# EAGLE board MainBoard (EAGLE 9.0.1), part 1 of 2
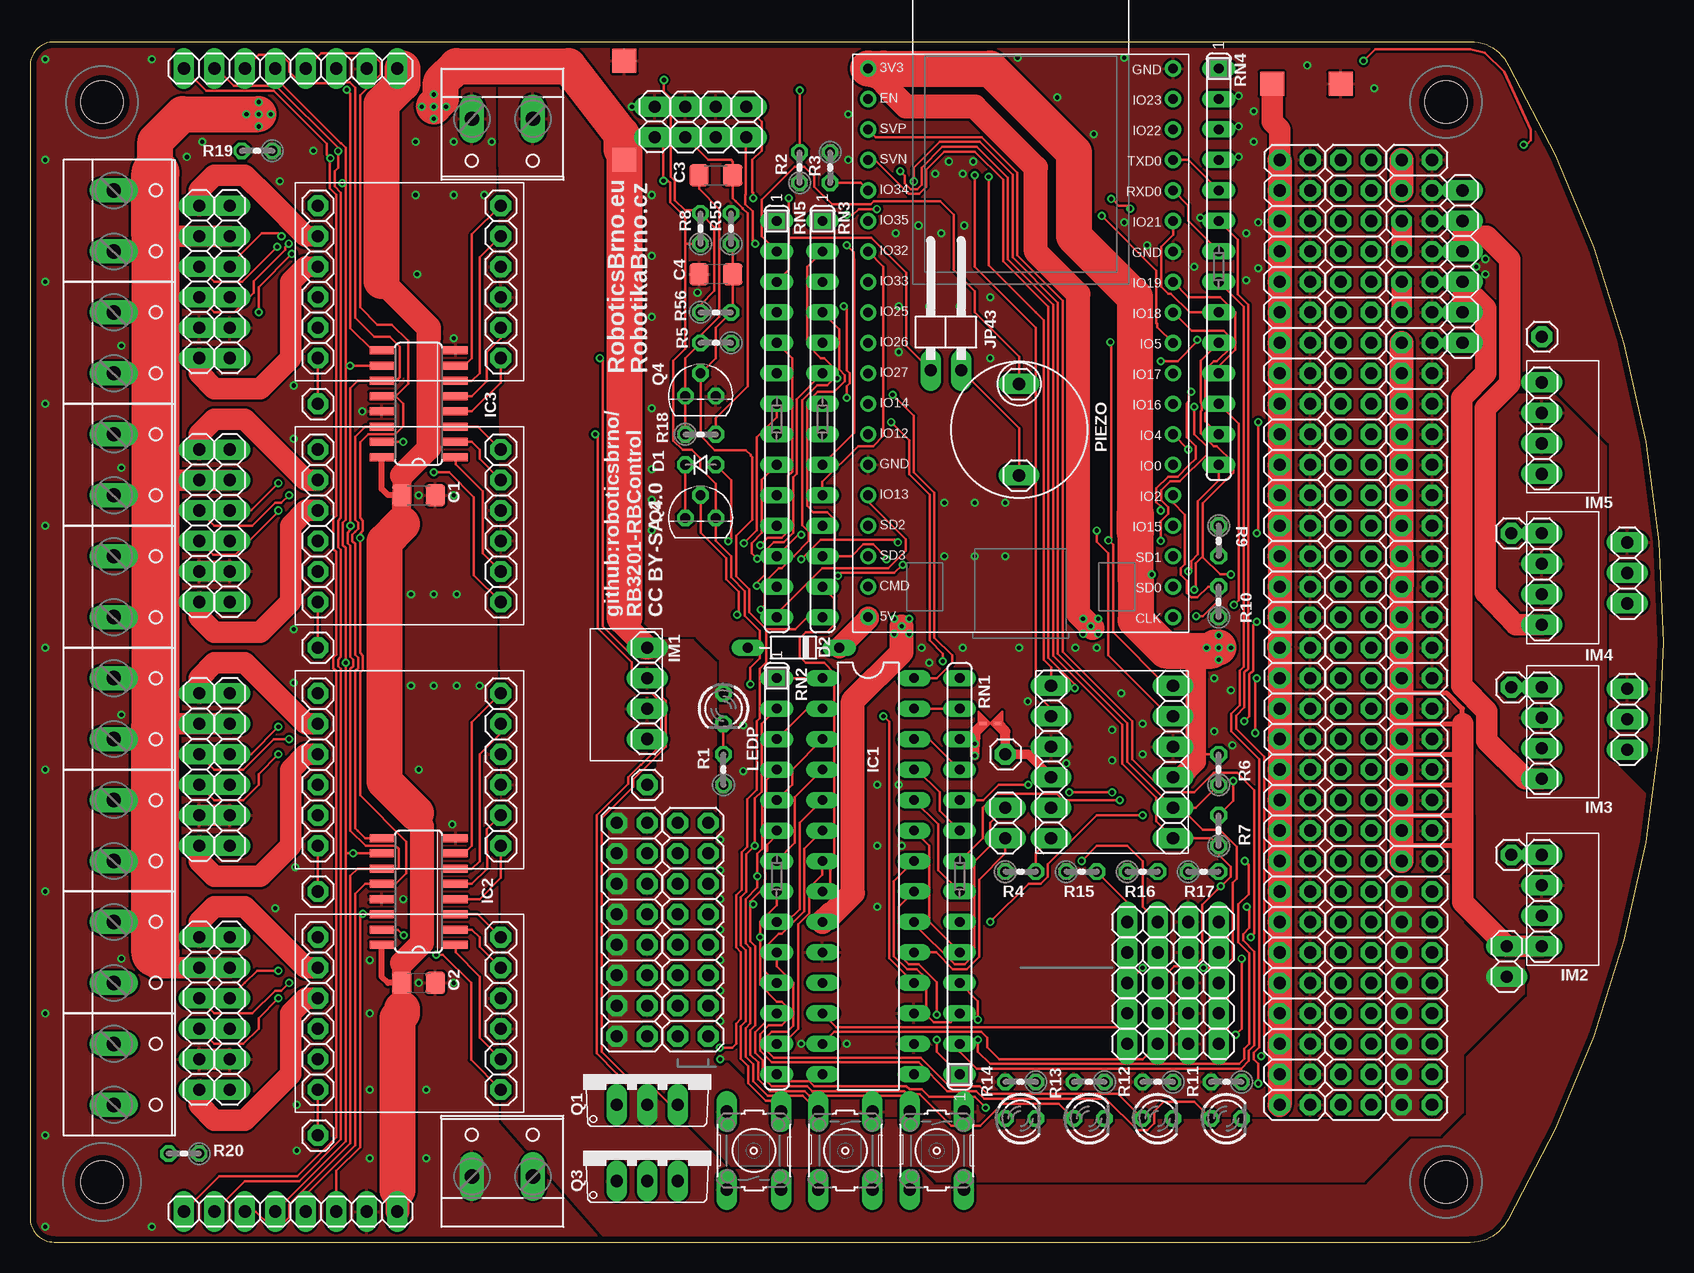
[diagram p0: board, top side]
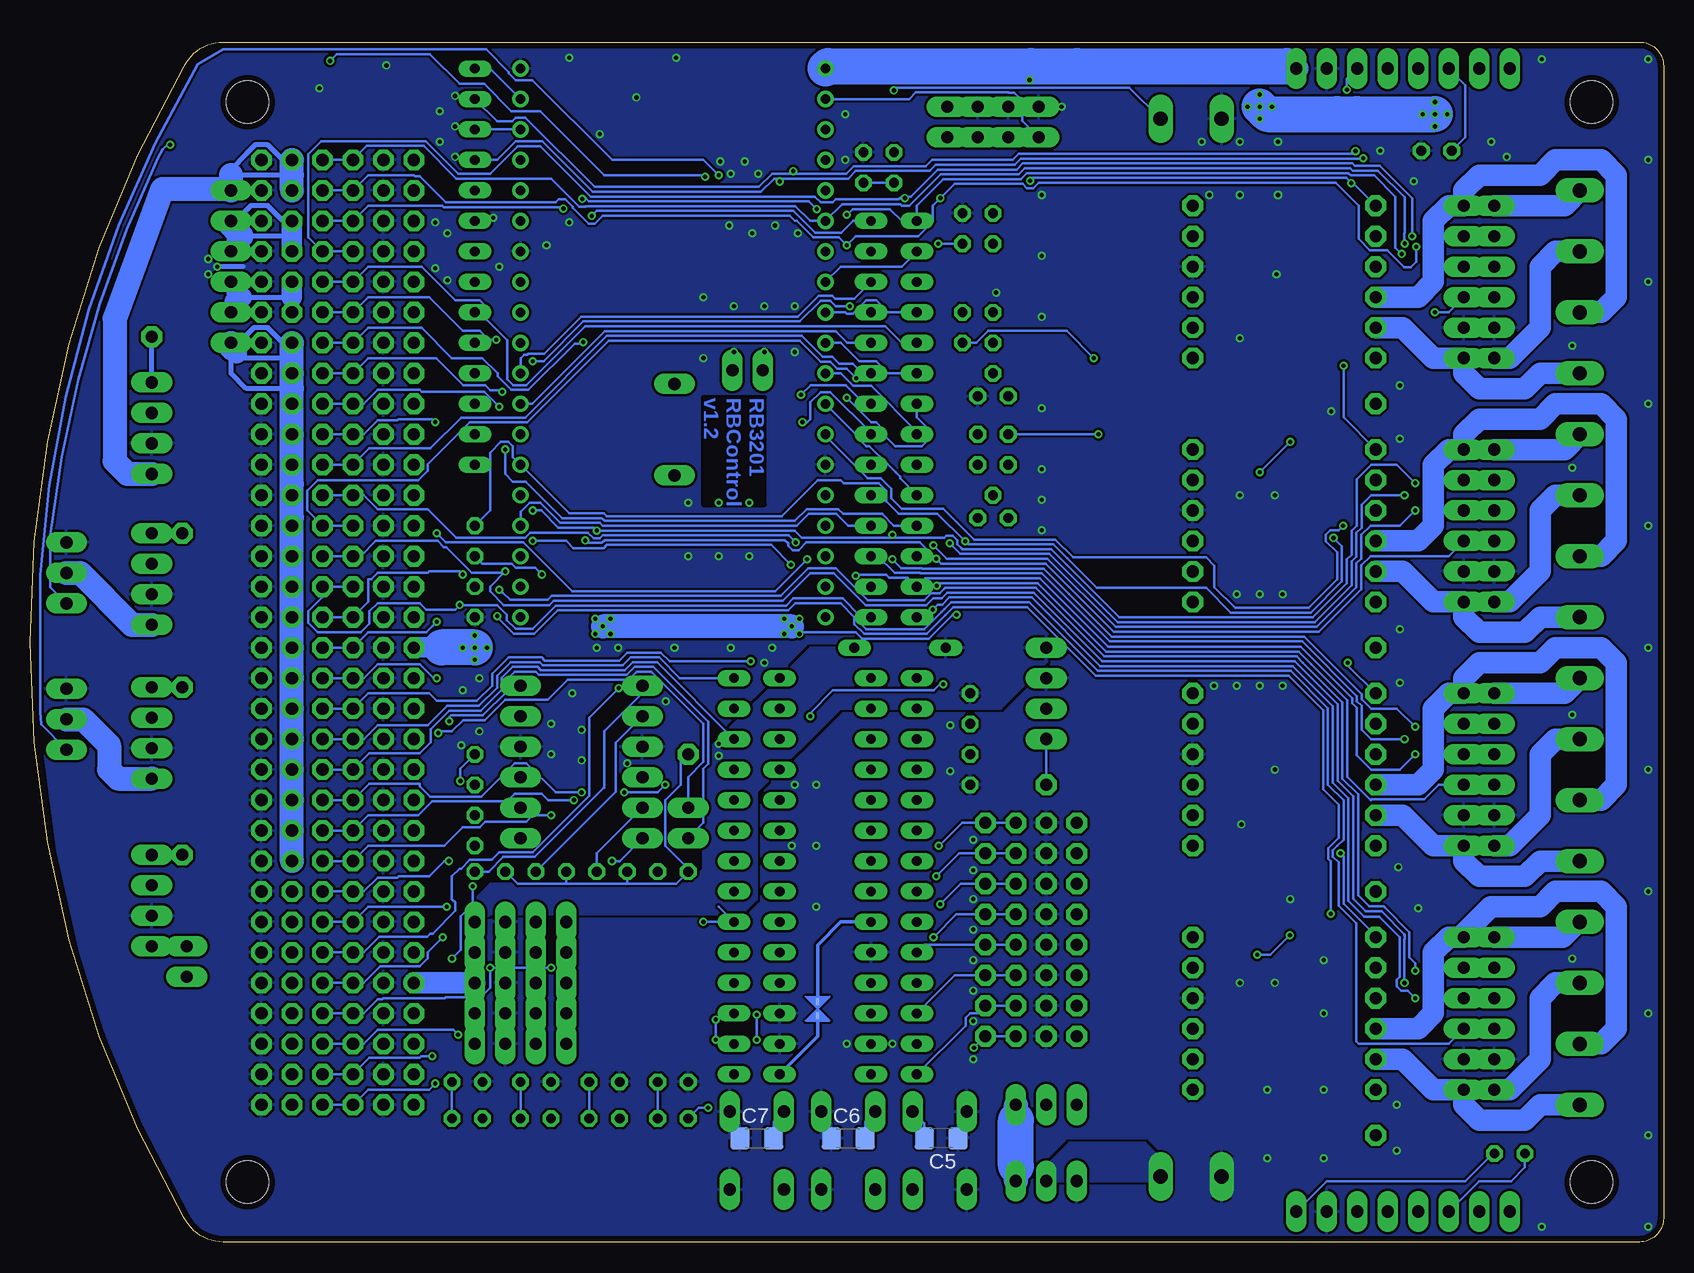
[diagram p1: board, bottom side, seen from below]

Size 136.13 x 100 mm. Coordinates in mm from the lower left corner, seen from the top.
Outline: 123.27,2 arc60 123.27,98 arc63 120.03,100 2,100 arc90 0,98 0,2 arc90 2,0 120.03,0 arc63 123.27,2
Copper layers (1*16): Top 0.035mm / dielectric 1.5mm / Bottom 0.035mm
Design rules "robotikabrno *": minimum track width 0.2mm, minimum drill 0.35mm, track to track 0.2mm, track to pad 0.2mm, pad to pad 0.2mm, via to via 0.2mm, smd to smd 0.2mm, copper to edge 0.5mm, drill to drill 0.5mm, minimum pad ring 0.16mm, minimum via ring 0.16mm, stop-mask expansion 0.1mm, vias tented up to drill 0.4mm, thermal gap 0.2mm
Net classes: 0 default: width 0.2 mm, drill 0.35 mm, clearance 0.2 mm
Holes 3.5 mm at 6,5 6,95 118,95 118,5

## Footprints (pad centres in the part's own frame; a part is rotated, then mirrored left to right if it is on the bottom)
C1206 = smd 1.6 x 1.8: 1 -1.4,0; 2 1.4,0
D-2.5 = drill 0.813 octagon: A 1.27,0; C -1.27,0
D-7.5 = drill 0.813 long: A 3.81,0; C -3.81,0
DIL28-3 = drill 0.813 long: 1 -16.51,-3.81; 2 -13.97,-3.81; 3 -11.43,-3.81; 4 -8.89,-3.81; 5 -6.35,-3.81; 6 -3.81,-3.81; 7 -1.27,-3.81; 8 1.27,-3.81; 9 3.81,-3.81; 10 6.35,-3.81; 11 8.89,-3.81; 12 11.43,-3.81; 13 13.97,-3.81; 14 16.51,-3.81; 15 16.51,3.81; 16 13.97,3.81; 17 11.43,3.81; 18 8.89,3.81; 19 6.35,3.81; 20 3.81,3.81; 21 1.27,3.81; 22 -1.27,3.81; 23 -3.81,3.81; 24 -6.35,3.81; 25 -8.89,3.81; 26 -11.43,3.81; 27 -13.97,3.81; 28 -16.51,3.81
SO16 = smd 0.66 x 2.032: 1 -4.445,-3.073; 2 -3.175,-3.073; 3 -1.905,-3.073; 4 -0.635,-3.073; 5 0.635,-3.073; 6 1.905,-3.073; 7 3.175,-3.073; 8 4.445,-3.073; 9 4.445,3.073; 10 3.175,3.073; 11 1.905,3.073; 12 0.635,3.073; 13 -0.635,3.073; 14 -1.905,3.073; 15 -3.175,3.073; 16 -4.445,3.073
STEPDOWN = drill 1.016 long: EN 1.27,8.89; GND 1.27,3.81; IN 1.27,6.35; OUT 1.27,1.27
DEVKITC = drill 0.8: 1 -12.7,46.99; 2 -12.7,44.45; 3 -12.7,41.91; 4 -12.7,39.37; 5 -12.7,36.83; 6 -12.7,34.29; 7 -12.7,31.75; 8 -12.7,29.21; 9 -12.7,26.67; 10 -12.7,24.13; 11 -12.7,21.59; 12 -12.7,19.05; 13 -12.7,16.51; 14 -12.7,13.97; 15 -12.7,11.43; 16 -12.7,8.89; 17 -12.7,6.35; 18 -12.7,3.81; 19 -12.7,1.27; 20 12.7,1.27; 21 12.7,3.81; 22 12.7,6.35; 23 12.7,8.89; 24 12.7,11.43; 25 12.7,13.97; 26 12.7,16.51; 27 12.7,19.05; 28 12.7,21.59; 29 12.7,24.13; 30 12.7,26.67; 31 12.7,29.21; 32 12.7,31.75; 33 12.7,34.29; 34 12.7,36.83; 35 12.7,39.37; 36 12.7,41.91; 37 12.7,44.45; 38 12.7,46.99
PINHEAD = drill 1.016 octagon: !SLEEP 1.27,13.97; GND 16.51,8.89; IN1 16.51,1.27; IN2 16.51,3.81; IN3 16.51,11.43; IN4 16.51,13.97; OUT1 1.27,11.43; OUT2 1.27,8.89; OUT3 1.27,6.35; OUT4 1.27,3.81; ULT 1.27,1.27; VCC 16.51,6.35
LEVEL_SHIFTER = drill 1.016 long: 1 1.27,1.27; 2 3.81,1.27; 3 6.35,1.27; 4 8.89,1.27; 5 11.43,1.27; 6 13.97,1.27; 7 13.97,11.43; 8 11.43,11.43; 9 8.89,11.43; 10 6.35,11.43; 11 3.81,11.43; 12 1.27,11.43
1X01 = drill 1.016 octagon: 1 0,0
1X02 = drill 1.016 long: 1 -1.27,0; 2 1.27,0
2X16 = drill 1.016 octagon: 1 -19.05,-1.27; 2 -19.05,1.27; 3 -16.51,-1.27; 4 -16.51,1.27; 5 -13.97,-1.27; 6 -13.97,1.27; 7 -11.43,-1.27; 8 -11.43,1.27; 9 -8.89,-1.27; 10 -8.89,1.27; 11 -6.35,-1.27; 12 -6.35,1.27; 13 -3.81,-1.27; 14 -3.81,1.27; 15 -1.27,-1.27; 16 -1.27,1.27; 17 1.27,-1.27; 18 1.27,1.27; 19 3.81,-1.27; 20 3.81,1.27; 21 6.35,-1.27; 22 6.35,1.27; 23 8.89,-1.27; 24 8.89,1.27; 25 11.43,-1.27; 26 11.43,1.27; 27 13.97,-1.27; 28 13.97,1.27; 29 16.51,-1.27; 30 16.51,1.27; 31 19.05,-1.27; 32 19.05,1.27
2X08 = drill 1.016 octagon: 1 -8.89,-1.27; 2 -8.89,1.27; 3 -6.35,-1.27; 4 -6.35,1.27; 5 -3.81,-1.27; 6 -3.81,1.27; 7 -1.27,-1.27; 8 -1.27,1.27; 9 1.27,-1.27; 10 1.27,1.27; 11 3.81,-1.27; 12 3.81,1.27; 13 6.35,-1.27; 14 6.35,1.27; 15 8.89,-1.27; 16 8.89,1.27
1X03 = drill 1.016 long: 1 -2.54,0; 2 0,0; 3 2.54,0
1X08 = drill 1.016 long: 1 -8.89,0; 2 -6.35,0; 3 -3.81,0; 4 -1.27,0; 5 1.27,0; 6 3.81,0; 7 6.35,0; 8 8.89,0
1X06 = drill 1.016 long: 1 -6.35,0; 2 -3.81,0; 3 -1.27,0; 4 1.27,0; 5 3.81,0; 6 6.35,0
1X04 = drill 1.016 long: 1 -3.81,0; 2 -1.27,0; 3 1.27,0; 4 3.81,0
1X02/90 = drill 1.016 long: 1 -1.27,-3.81; 2 1.27,-3.81
LED3MM = drill 0.813 octagon: A -1.27,0; K 1.27,0
PIEZO = drill 1.016 long: + 1.27,8.89; - 1.27,1.27
TO220V = drill 1.016 long: 1 -2.54,-2.54; 2 0,-2.54; 3 2.54,-2.54
TO92 = drill 0.813 octagon: 1 -1.27,0; 2 0,1.905; 3 1.27,0
0204V = drill 0.813 octagon: 1 -1.27,0; 2 1.27,0
SIL14 = drill 0.813 long: 1 -16.51,0; 2 -13.97,0; 3 -11.43,0; 4 -8.89,0; 5 -6.35,0; 6 -3.81,0; 7 -1.27,0; 8 1.27,0; 9 3.81,0; 10 6.35,0; 11 8.89,0; 12 11.43,0; 13 13.97,0; 14 16.51,0
B3F-10XX = drill 1.016 long: 1 -3.251,2.261; 2 3.251,2.261; 3 -3.251,-2.261; 4 3.251,-2.261
TP20SQ = smd 2 x 2: TP 0,0
SJ_NC = smd 0.61 x 0.305: P$1 0.4,1; P$2 1.6,1
W237-132 = drill 1.194 long: 1 -2.54,-0.635; 2 2.54,-0.635

## Placement (x,y rotation side)
C1  100n  [C1206]  32.38,62.23 0 top
C2  100n  [C1206]  32.38,21.59 0 top
C3  10u  [C1206]  57.15,88.9 0 top
C4  10u  [C1206]  57.15,80.64 180 top
C5  100n  [C1206]  60.2,8.64 180 bottom
C6  100n  [C1206]  67.94,8.64 0 bottom
C7  100n  [C1206]  75.56,8.64 0 bottom
D1  [D-2.5]  55.88,64.77 0 top
D2  [D-7.5]  63.63,49.53 180 top
IC1  MCP23017SP  [DIL28-3]  69.85,30.48 270 top
IC2  74HC595D  [SO16]  32.38,29.21 90 top
IC3  74HC595D  [SO16]  32.38,69.85 90 top
IM1  STEPDOWN  [STEPDOWN]  52.7,50.8 180 top
IM2  STEPDOWN  [STEPDOWN]  124.71,23.37 0 top
IM3  STEPDOWN  [STEPDOWN]  124.71,37.34 0 top
IM4  STEPDOWN  [STEPDOWN]  124.71,50.16 0 top
IM5  STEPDOWN  [STEPDOWN]  124.71,62.74 0 top
IM6  DEVKITC  [DEVKITC]  82.55,50.8 0 top
IM7  DRV8833_BOARD  [PINHEAD]  22.72,11.43 0 top
IM8  DRV8833_BOARD  [PINHEAD]  22.72,31.75 0 top
IM9  DRV8833_BOARD  [PINHEAD]  22.72,52.07 0 top
IM10  DRV8833_BOARD  [PINHEAD]  22.72,72.39 0 top
IM11  LEVEL_SHIFTER  [LEVEL_SHIFTER]  96.52,32.38 90 top
JP1  IM1_EN  [1X01]  51.44,38.1 0 top
JP2  IM2_EN  [1X01]  123.44,32.26 0 top
JP3  IM3_EN  [1X01]  123.44,46.23 0 top
JP4  IM4_EN  [1X01]  123.44,59.05 0 top
JP5  IM5_EN  [1X01]  125.98,75.44 0 top
JP6  IC1_INT  [1X02]  81.28,34.92 90 top
JP7  IM1_2  [1X02]  123.06,23.37 270 top
JP8  IM2_3  [1X02]  119.38,76.2 270 top
JP9  IM3_4  [1X02]  119.38,81.28 270 top
JP10  IM4_5  [1X02]  119.38,86.36 270 top
JP11  START_BUTTON  [1X02]  54.61,93.34 90 top
JP12  5V_GND_1  [2X16]  115.57,71.12 90 top
JP13  5V_GND_2  [2X16]  115.57,30.48 90 top
JP14  5V_GND_3  [2X08]  50.16,26.04 90 top
JP15  SIG1  [2X16]  110.49,71.12 90 top
JP16  SIG2  [2X16]  110.49,30.48 90 top
JP17  SIG3  [2X08]  55.24,26.04 270 top
JP18  3V3_GND_1  [2X16]  105.41,71.12 90 top
JP19  3V3_GND_2  [2X16]  105.41,30.48 90 top
JP20  STOP_BUTTON  [1X02]  57.15,93.34 90 top
JP21  RESET  [1X02]  52.07,93.34 270 top
JP22  IO2_5V  [1X03]  133.1,55.75 90 top
JP23  IO1_5V  [1X03]  133.1,43.56 90 top
JP24  SHUTDOWN_ESP  [1X02]  59.69,93.34 90 top
JP25  EXPANDER_OUT  [1X08]  21.72,97.79 180 top
JP26  EXPANDER_IN  [1X08]  21.72,2.54 180 top
JP27  IM7_ULT  [1X01]  23.99,8.89 90 top
JP28  IM8_ULT  [1X01]  23.99,29.21 90 top
JP29  IM9_ULT  [1X01]  23.99,49.53 90 top
JP30  IM10_ULT  [1X01]  23.99,69.85 90 top
JP31  M2  [1X06]  14.1,19.05 270 top
JP32  M4  [1X06]  14.1,39.37 270 top
JP33  M6  [1X06]  14.1,59.69 270 top
JP34  M8  [1X06]  14.1,80.01 270 top
JP35  M1  [1X06]  16.64,19.05 270 top
JP36  M3  [1X06]  16.64,39.37 270 top
JP37  M5  [1X06]  16.64,59.69 270 top
JP38  M7  [1X06]  16.64,80.01 270 top
JP39  IM11_HVIOREF  [1X01]  81.28,40.64 0 top
JP40  I2C1_3V3  [1X04]  95.25,19.05 0 top
JP41  I2C2_3V3  [1X04]  95.25,16.51 0 top
JP42  I2C3_3V3  [1X04]  95.25,21.59 0 top
JP43  PIEZO_ON  [1X02/90]  76.33,76.45 0 top
JP44  I2C2_5V  [1X04]  95.25,24.13 0 top
JP45  I2C1_5V  [1X04]  95.25,26.67 0 top
LED1  RED  [LED3MM]  99.69,10.29 0 top
LED2  YELLOW  [LED3MM]  93.98,10.29 0 top
LED3  GREEN  [LED3MM]  88.27,10.29 0 top
LED4  BLUE/WHITE  [LED3MM]  82.55,10.29 0 top
LEDP  [LED3MM]  57.78,44.45 270 top
PIEZO  PIEZO  [PIEZO]  81.15,62.61 0 top
Q1  [TO220V]  51.44,13.97 0 top
Q2  [TO92]  55.88,60.33 0 top
Q3  [TO220V]  51.44,7.62 0 top
Q4  [TO92]  55.88,70.48 0 top
R1  3k3  [0204V]  57.78,39.37 90 top
R2  82k  [0204V]  64.14,89.53 90 top
R3  10k  [0204V]  66.67,89.53 270 top
R4  3k3  [0204V]  82.55,30.86 0 top
R5  100k  [0204V]  57.15,74.93 180 top
R6  3k3  [0204V]  99.06,39.37 90 top
R7  3k3  [0204V]  99.06,34.29 90 top
R8  10k  [0204V]  55.88,84.45 90 top
R9  10k  [0204V]  99.06,58.42 270 top
R10  10k  [0204V]  99.06,53.34 90 top
R11  1k  [0204V]  99.69,13.34 180 top
R12  1k  [0204V]  93.98,13.34 180 top
R13  1k  [0204V]  88.27,13.34 180 top
R14  1k  [0204V]  82.55,13.34 180 top
R15  3k3  [0204V]  87.63,30.86 0 top
R16  3k3  [0204V]  92.71,30.86 0 top
R17  3k3  [0204V]  97.79,30.86 0 top
R18  2M  [0204V]  55.88,67.31 0 top
R19  10k  [0204V]  18.92,90.93 180 top
R20  10k  [0204V]  12.83,7.37 180 top
R55  2M  [0204V]  58.42,84.45 90 top
R56  10k  [0204V]  57.15,77.47 0 top
RN1  [SIL14]  77.47,30.48 90 top
RN2  [SIL14]  62.23,30.48 270 top
RN3  [SIL14]  66.04,68.58 270 top
RN4  [SIL14]  99.06,81.28 270 top
RN5  [SIL14]  62.23,68.58 270 top
SW1  [B3F-10XX]  60.33,7.62 90 top
SW2  [B3F-10XX]  67.94,7.62 270 top
SW3  [B3F-10XX]  75.56,7.62 270 top
TP1  TPTP20SQ  [TP20SQ]  103.5,96.52 0 top
TP2  TPTP20SQ  [TP20SQ]  109.22,96.52 0 top
TP3  TPTP20SQ  [TP20SQ]  49.53,98.42 0 top
TP4  TPTP20SQ  [TP20SQ]  49.53,90.17 0 top
U$1  SJ_NC  [SJ_NC]  71.5,20.45 270 bottom
U$2  SJ_NC  [SJ_NC]  81.03,44.21 180 top
X1  POWER_IN  [W237-132]  39.37,6.1 0 top
X2  POWER_OUT  [W237-132]  39.37,92.96 180 top
X3  M2  [W237-132]  7.62,24.13 270 top
X4  M4  [W237-132]  7.62,44.45 270 top
X5  M6  [W237-132]  7.62,64.77 270 top
X6  M8  [W237-132]  7.62,85.09 270 top
X7  M1  [W237-132]  7.62,13.97 270 top
X8  M3  [W237-132]  7.62,34.29 270 top
X9  M5  [W237-132]  7.62,54.61 270 top
X10  M7  [W237-132]  7.62,74.93 270 top

## Library data of the parts
C1-C7 R5 R8-R10 R18-R20 R55 R56 = rcl_upravena
D1 D2 = diode
IC1 = microchip; MF: MICROCHIP; MPN: MCP23017-E/SP; OC_FARNELL: 1332088; OC_NEWARK: 31K2959
IC2 IC3 = 74xx-eu
IM1-IM5 = StepDown
IM6 = esp32
IM7-IM10 = DRV8833board
IM11 = LevelShifter
JP1-JP45 = pinhead
LED1-LED4 LEDP = led
PIEZO = piezo
Q1-Q4 = transistors
R1-R4 R6 R7 R11-R17 = resistor
RN1-RN5 = resistor-sil; OC_FARNELL: unknown; OC_MOUSER: 652-4614X-2LF-180; OC_NEWARK: unknown
SW1-SW3 = switch-omron; MPN: B3F-1000; OC_FARNELL: 176432; OC_NEWARK: 36M3542
TP1-TP4 = testpad
U$1 U$2 = SolderJumperNormallyClosed
X1-X10 = con-wago-508; OC_FARNELL: unknown; OC_NEWARK: unknown

## Nets
5V_2: IM2.OUT JP7.1 JP8.2 JP12.2 JP12.4 JP12.6 JP12.8 JP12.10 JP12.12 JP12.14 JP12.16 JP12.18 JP12.20 JP13.18 JP13.20 JP13.22 JP13.24 JP13.26 JP13.28 JP13.30 JP13.32
5V_3: IM3.OUT JP8.1 JP9.2 JP12.22 JP12.24 JP23.2
5V_4: IM4.OUT JP9.1 JP10.2 JP12.26 JP12.28 JP22.2
5V_5: IM5.OUT JP10.1 JP12.30 JP12.32
!FAULT0: IM7.ULT JP27.1
!FAULT1: IM8.ULT JP28.1
!FAULT2: IM9.ULT JP29.1
!FAULT3: IM10.ULT JP30.1
+3V3: C1.1 C2.1 IC1.9 IC2.16 IC3.16 IM6.1 IM11.3 JP18.2 JP18.4 JP18.6 JP18.8 JP18.10 JP18.12 JP18.14 JP18.16 JP18.18 JP18.20 JP18.22 JP18.24 JP18.26 JP18.28 JP18.30 JP18.32 JP19.2 JP19.4 JP19.6 JP19.8 JP19.10 JP19.12 JP19.14 JP19.16 JP19.18 JP19.20 JP19.22 JP19.24 JP19.26 JP19.28 JP19.30 JP19.32 JP25.1 JP26.1 JP40.4 JP41.4 JP42.4 Q2.2 R6.2 R7.2 R8.2 R9.2 R20.1 R56.1 TP1.TP U$1.P$1
+5V: D2.A IM1.OUT JP7.2 JP13.2 JP13.4 JP13.6 JP13.8 JP13.10 JP13.12 JP13.14 JP13.16 JP14.2 JP14.4 JP14.6 JP14.8 JP14.10 JP14.12 JP14.14 JP14.16 JP31.2 JP32.2 JP33.2 JP34.2 JP35.2 JP36.2 JP37.2 JP38.2 JP44.4 JP45.4 LEDP.A TP4.TP U$2.P$2
+5V_ESP: D2.C IM6.19
_EN_: D1.C Q2.1
A5V: IM11.8 JP23.1 R16.2
B5V: IM11.7 JP22.1 R17.2
BAT: Q3.2 X1.2
BAT_PROT: Q1.3 Q3.3 R5.1
BATT_REF: IM6.5 R2.1 R3.2
EA0: JP16.13 JP16.14 RN1.2
EA0_: IC1.21 RN1.1
EA1: JP16.15 JP16.16 RN1.4
EA1_: IC1.22 RN1.3
EA2: JP16.17 JP16.18 RN1.6
EA2_: IC1.23 RN1.5
EA3: JP16.19 JP16.20 RN1.8
EA3_: IC1.24 RN1.7
EA4: JP16.21 JP16.22 RN1.10
EA4_: IC1.25 RN1.9
EA5: JP16.23 JP16.24 RN1.12
EA5_: IC1.26 RN1.11
EA6: JP16.25 JP16.26 RN1.14
EA6_: IC1.27 RN1.13
EA7: JP16.27 JP16.28 RN3.8
EA7_: IC1.28 RN3.7
EB0: C5.2 JP17.1 JP17.2 RN2.2 SW1.4
EB0_: IC1.1 RN2.1
EB1: C6.2 JP17.3 JP17.4 RN2.4 SW2.3
EB1_: IC1.2 RN2.3
EB2: C7.2 JP17.5 JP17.6 RN2.6 SW3.3
EB2_: IC1.3 RN2.5
EB3: JP17.7 JP17.8 LED1.A RN2.8
EB3_: IC1.4 RN2.7
EB4: JP17.9 JP17.10 LED2.A RN2.10
EB4_: IC1.5 RN2.9
EB5: JP17.11 JP17.12 LED3.A RN2.12
EB5_: IC1.6 RN2.11
EB6: JP17.13 JP17.14 LED4.A RN2.14
EB6_: IC1.7 RN2.13
EINT0: IC1.20 JP6.2 JP16.29 JP16.30
EINT1: IC1.19 JP6.1 JP16.31 JP16.32
EN: IC1.18 IC2.10 IC3.10 IM6.2 IM7.!SLEEP IM8.!SLEEP IM9.!SLEEP IM10.!SLEEP JP21.2 JP25.5 JP26.5 Q2.3 R8.1
ENC1A: JP15.1 JP15.2 JP35.3 RN4.10
ENC1A_: IM6.33 RN4.9
ENC1B: JP15.3 JP15.4 JP35.4 RN4.12
ENC1B_: IM6.31 RN4.11
ENC2A: JP15.5 JP15.6 JP31.3 RN4.14
ENC2A_: IM6.30 RN4.13
ENC2B: JP15.7 JP15.8 JP31.4 RN3.2
ENC2B_: IM6.29 RN3.1
ENC3A: JP15.9 JP15.10 JP36.3 RN3.4
ENC3A_: IM6.28 RN3.3
ENC3B: JP15.11 JP15.12 JP36.4 RN3.6
ENC3B_: IM6.27 RN3.5
ENC4A: JP15.13 JP15.14 JP32.3 RN3.12
ENC4A_: IM6.23 RN3.11
ENC4B: JP15.15 JP15.16 JP32.4 RN5.13
ENC4B_: IM6.15 RN5.14
ENC5A: IM11.5 JP15.17 JP15.18 JP37.3 RN5.12
ENC5A_: IM6.26 RN5.11
ENC5B: IM11.6 JP15.19 JP15.20 JP37.4 RN5.9
ENC5B_: IM6.12 RN5.10
ENC6A: JP15.21 JP15.22 JP33.3 RN5.7
ENC6A_: IM6.11 RN5.8
ENC6B: JP15.23 JP15.24 JP33.4 RN5.5
ENC6B_: IM6.10 RN5.6
ENC7A: JP15.25 JP15.26 JP38.3 JP43.1 RN5.3
ENC7A_: IM6.9 RN5.4
ENC7B: JP15.27 JP15.28 JP38.4 RN5.1
ENC7B_: IM6.8 PIEZO.+ RN5.2
ENC8A: JP15.29 JP15.30 JP24.2 JP34.3 RN3.9
ENC8A_: IM6.7 RN3.10
ENC8B: IM6.6 JP15.31 JP15.32 JP34.4
ESP_!SHUTDOWN: C4.1 JP17.15 JP17.16 JP20.1 JP24.1 Q4.2 R55.1 R56.2 RN3.14
ESP_!SHUTDOWN!_: IC1.8 RN3.13
EXP_A0: IC1.15 U$1.P$2
GND: C1.2 C2.2 C4.2 C5.1 C6.1 C7.1 IC1.10 IC1.16 IC1.17 IC2.8 IC2.13 IC3.8 IC3.13 IM1.GND IM2.GND IM3.GND IM4.GND IM5.GND IM6.14 IM6.32 IM6.38 IM7.GND IM8.GND IM9.GND IM10.GND IM11.4 IM11.9 JP11.2 JP12.1 JP12.3 JP12.5 JP12.7 JP12.9 JP12.11 JP12.13 JP12.15 JP12.17 JP12.19 JP12.21 JP12.23 JP12.25 JP12.27 JP12.29 JP12.31 JP13.1 JP13.3 JP13.5 JP13.7 JP13.9 JP13.11 JP13.13 JP13.15 JP13.17 JP13.19 JP13.21 JP13.23 JP13.25 JP13.27 JP13.29 JP13.31 JP14.1 JP14.3 JP14.5 JP14.7 JP14.9 JP14.11 JP14.13 JP14.15 JP18.1 JP18.3 JP18.5 JP18.7 JP18.9 JP18.11 JP18.13 JP18.15 JP18.17 JP18.19 JP18.21 JP18.23 JP18.25 JP18.27 JP18.29 JP18.31 JP19.1 JP19.3 JP19.5 JP19.7 JP19.9 JP19.11 JP19.13 JP19.15 JP19.17 JP19.19 JP19.21 JP19.23 JP19.25 JP19.27 JP19.29 JP19.31 JP20.2 JP21.1 JP22.3 JP23.3 JP25.2 JP26.2 JP31.5 JP32.5 JP33.5 JP34.5 JP35.5 JP36.5 JP37.5 JP38.5 JP40.3 JP41.3 JP42.3 JP44.3 JP45.3 Q3.1 Q4.3 R1.1 R3.1 R10.1 R11.2 R12.2 R13.2 R14.2 R19.1 R55.2 SW1.1 SW1.2 SW2.1 SW2.2 SW3.1 SW3.2 TP2.TP TP3.TP X1.1 X2.2
HVIOREF: IM11.10 JP39.1 R4.1 R15.1 R16.1 R17.1 U$2.P$1
IC2_A: IC2.15 IM7.IN1
IC2_B: IC2.1 IM7.IN2
IC2_C: IC2.2 IM7.IN3
IC2_D: IC2.3 IM7.IN4
IC2_E: IC2.4 IM8.IN1
IC2_F: IC2.5 IM8.IN2
IC2_G: IC2.6 IM8.IN3
IC2_H: IC2.7 IM8.IN4
IC2_QH*: IC2.9 IC3.14
IC3_A: IC3.15 IM9.IN1
IC3_B: IC3.1 IM9.IN2
IC3_C: IC3.2 IM9.IN3
IC3_D: IC3.3 IM9.IN4
IC3_E: IC3.4 IM10.IN1
IC3_F: IC3.5 IM10.IN2
IC3_G: IC3.6 IM10.IN3
IC3_H: IC3.7 IM10.IN4
IC3_QH*: IC3.9 JP25.3
IM7_O1: IM7.OUT1 JP31.1 X3.1
IM7_O2: IM7.OUT2 JP31.6 X3.2
IM7_O3: IM7.OUT3 JP35.1 X7.1
IM7_O4: IM7.OUT4 JP35.6 X7.2
IM8_O1: IM8.OUT1 JP32.1 X4.1
IM8_O2: IM8.OUT2 JP32.6 X4.2
IM8_O3: IM8.OUT3 JP36.1 X8.1
IM8_O4: IM8.OUT4 JP36.6 X8.2
IM9_O1: IM9.OUT1 JP33.1 X5.1
IM9_O2: IM9.OUT2 JP33.6 X5.2
IM9_O3: IM9.OUT3 JP37.1 X9.1
IM9_O4: IM9.OUT4 JP37.6 X9.2
IM10_O1: IM10.OUT1 JP34.1 X6.1
IM10_O2: IM10.OUT2 JP34.6 X6.2
IM10_O3: IM10.OUT3 JP38.1 X10.1
IM10_O4: IM10.OUT4 JP38.6 X10.2
IO6_NC: IM6.20
IO7_NC: IM6.21
IO8_NC: IM6.22
IO9_NC: IM6.16
IO10_NC: IM6.17
IO11_NC: IM6.18
IO36: IM6.3 JP16.9 JP16.10
IO39: IM6.4 JP16.11 JP16.12
LED1: LED1.K R11.1
LED2: LED2.K R12.1
LED3: LED3.K R13.1
LED4: LED4.K R14.1
N$4: IM1.EN JP1.1
N$9: LEDP.K R1.2
PIEZO: JP43.2 PIEZO.-
RCKMOT: D1.A IC2.12 IC3.12 IM6.25 JP25.4 JP26.4 R9.1
RXD0: JP16.1 JP16.2 RN4.8
RXD0_: IM6.34 RN4.7
SCKMOT: IC2.11 IC3.11 IM6.13 JP25.6 JP26.6 R19.2 R20.2
SCL: IC1.12 IM11.2 JP16.7 JP16.8 JP25.8 JP26.8 JP40.1 JP41.1 JP42.1 R6.1 RN4.4
SCL5V: IM11.11 JP44.1 JP45.1 R15.2
SCL_: IM6.36 RN4.3
SDA: IC1.13 IM11.1 JP16.5 JP16.6 JP25.7 JP26.7 JP40.2 JP41.2 JP42.2 R7.1 RN4.2
SDA5V: IM11.12 JP44.2 JP45.2 R4.2
SDA_: IM6.37 RN4.1
SERMOT: IC2.14 IM6.24 JP26.3 R10.2
START_BUTTON: C3.2 JP11.1 R18.2
START_GATE: C3.1 Q1.1 Q4.1 R5.2 R18.1
STEP2_EN: IM2.EN JP2.1
STEP3_EN: IM3.EN JP3.1
STEP4_EN: IM4.EN JP4.1
STEP5_EN: IM5.EN JP5.1
TXD0: JP16.3 JP16.4 RN4.6
TXD0_: IM6.35 RN4.5
VCC: IM1.IN IM2.IN IM3.IN IM4.IN IM5.IN IM7.VCC IM8.VCC IM9.VCC IM10.VCC Q1.2 R2.2 X2.1